# Altium PCB CFD_Chip_Test_v6_noRouting.PcbDoc
Units mil, origin at the board's own origin, x right, y up, seen from the top; angles counter-clockwise.
Board outline 3185 x 3310 mil, 2 copper layers (Top Layer, Bottom Layer); 115 components, 90 nets, 432 pads, 32 vias.
Unrouted connection lines stored in the file: 310.
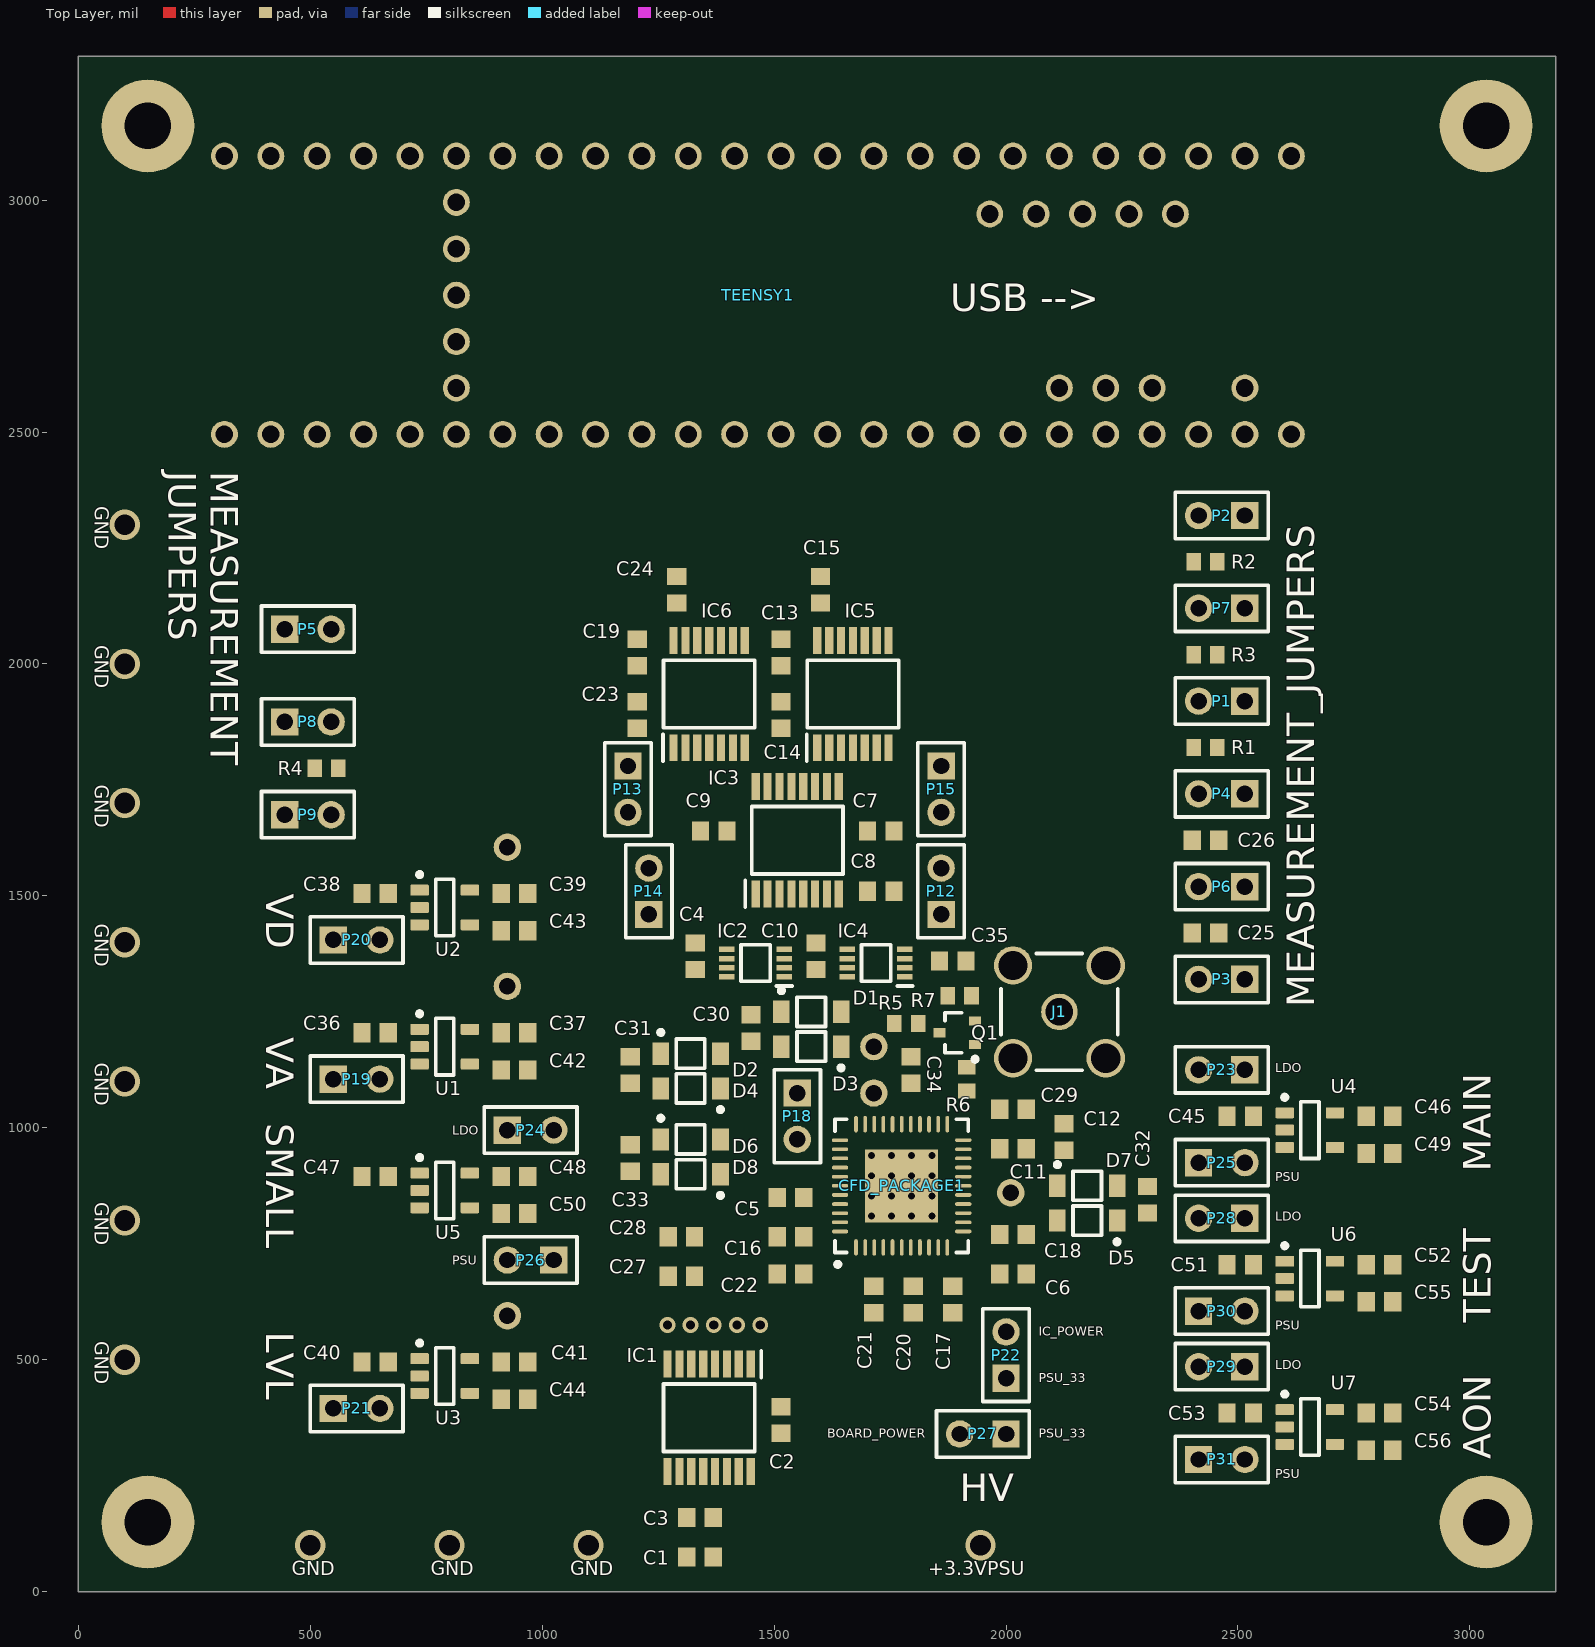
[diagram p0: Top Layer view]
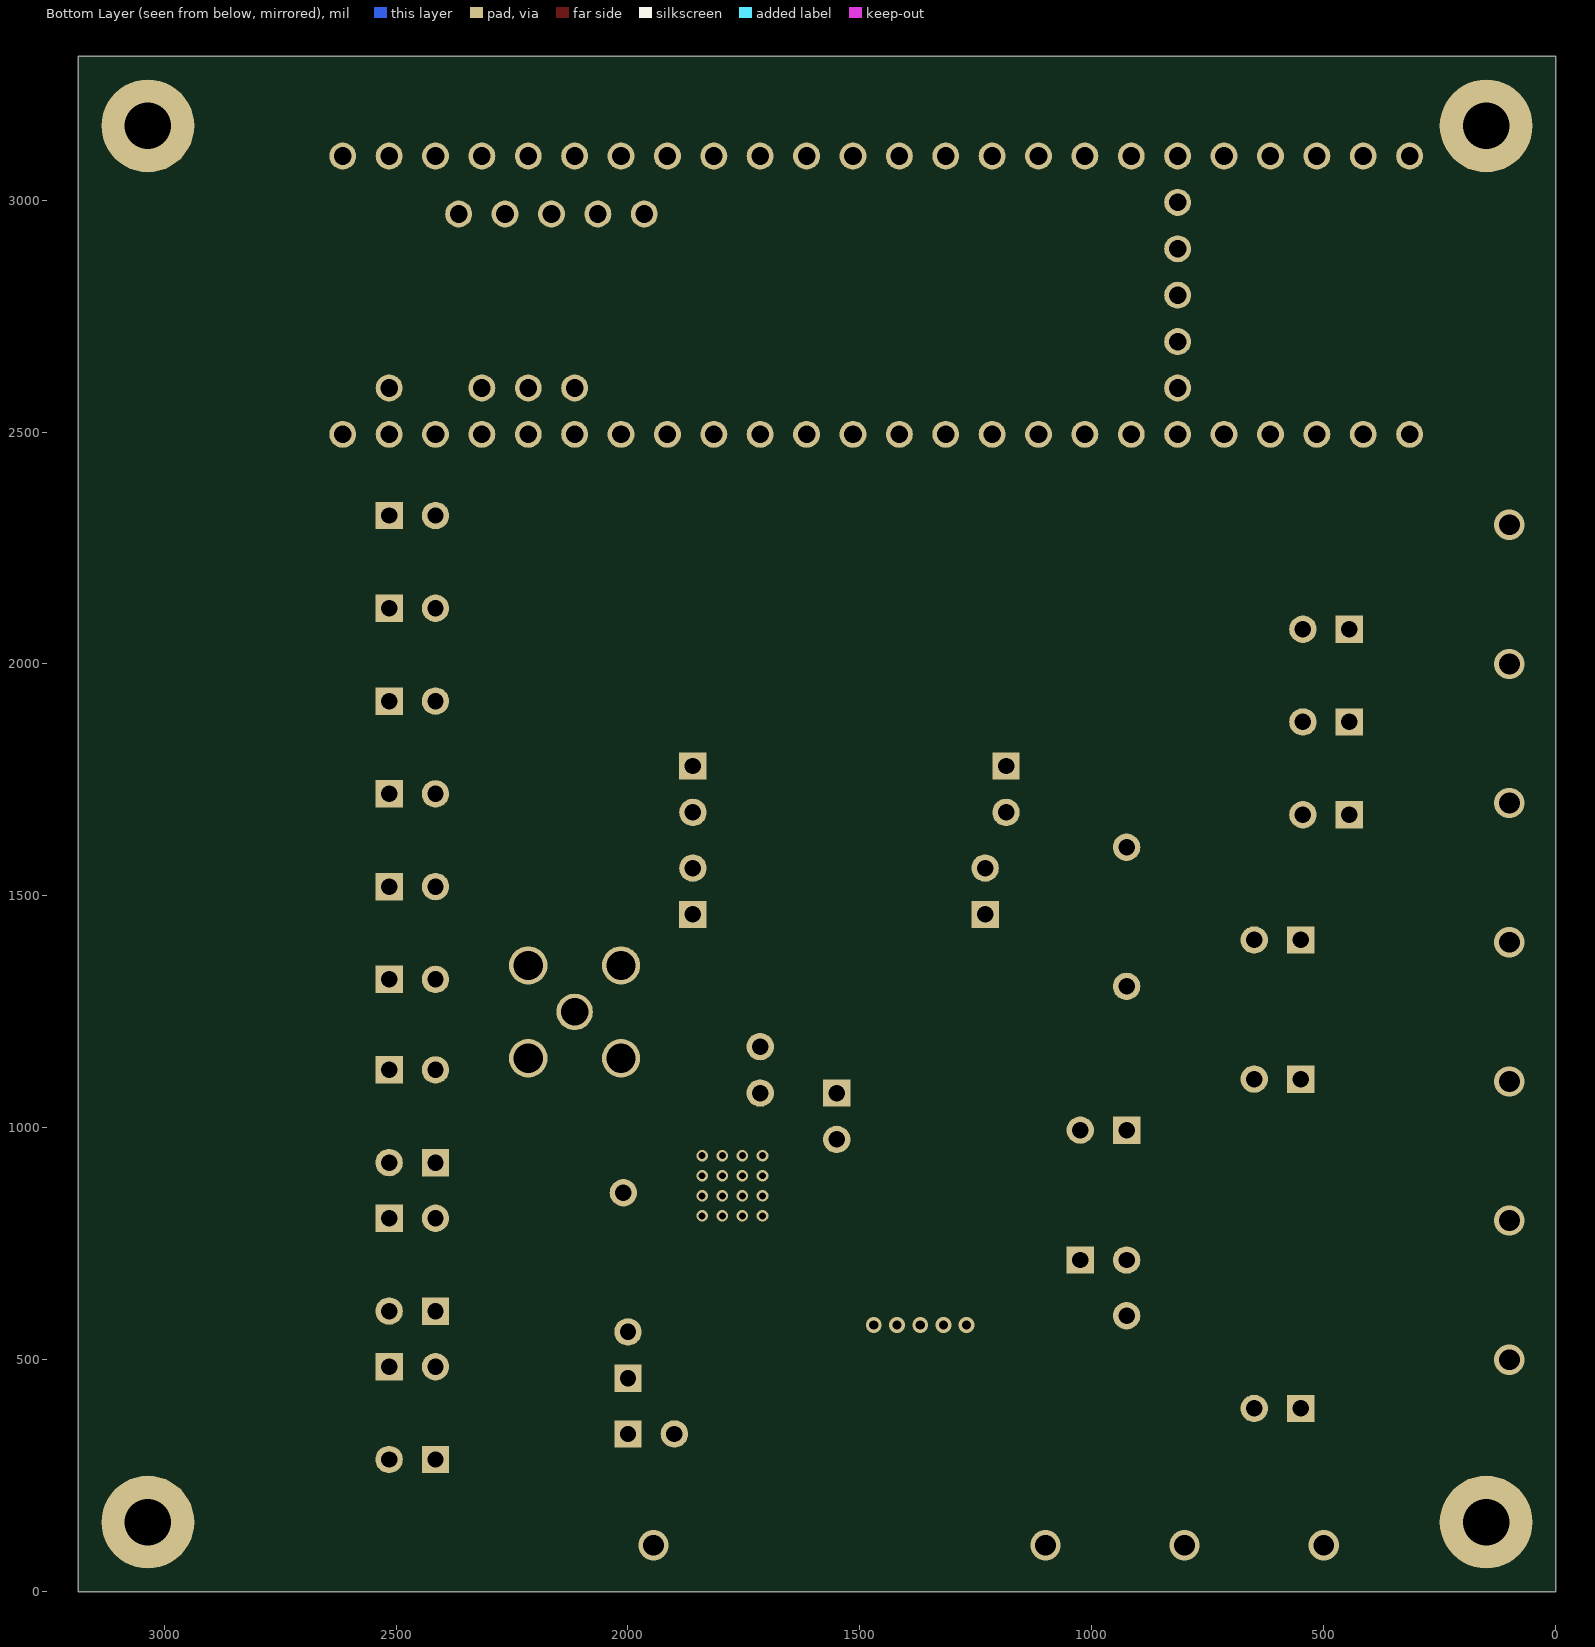
[diagram p1: Bottom Layer view, seen from below]

## Layer stack, top to bottom
Top Solder: solder mask 0.4, Solder Resist, Dk 3.5
Top Layer: signal copper 1.4
Dielectric 1: dielectric 12.6, FR-4, Dk 4.8
Bottom Layer: signal copper 1.4
Bottom Solder: solder mask 0.4, Solder Resist, Dk 3.5

## Board outline
0,0 3185,0 3185,3310 0,3310

## Design rules (kind name [scope] priority, off if disabled: settings)
AcuteAngle [All] p1: minimum=6.00000000000000E+0001 checktracksonly=FALSE
BoardOutlineClearance [All] p1: gap=15 ignorepadtopadclearanceinfootprint=FALSE
Clearance Clearance_outa_inner2 [InNamedPolygon('outa_inner2')] p1: gap=40 ignorepadtopadclearanceinfootprint=FALSE except(0: Arc-Hole Track-Hole SMDPad-Hole THPad-Hole Via-Hole Fill-Hole Poly-Hole Region-Hole Text-Hole)
Clearance Clearance_gnd_adc_vbus [InNamedPolygon('gnd_adc') vs InNet('VBUS')] p2: gap=60 ignorepadtopadclearanceinfootprint=FALSE except(0: Arc-Hole Track-Hole SMDPad-Hole THPad-Hole Via-Hole Fill-Hole Poly-Hole Region-Hole Text-Hole)
Clearance Clearance_gnd_adc [InNamedPolygon('gnd_adc')] p3: gap=20 ignorepadtopadclearanceinfootprint=FALSE except(0: Arc-Hole Track-Hole SMDPad-Hole THPad-Hole Via-Hole Fill-Hole Poly-Hole Region-Hole Text-Hole)
Clearance Clearance_dgnd [InNamedPolygon('dgnd')] p4: gap=15 ignorepadtopadclearanceinfootprint=FALSE except(0: Arc-Hole Track-Hole SMDPad-Hole THPad-Hole Via-Hole Fill-Hole Poly-Hole Region-Hole Text-Hole)
Clearance Clearance_vbus_keepout [InPolygon vs OnLayer('Keep-Out Layer')] p5: gap=20 ignorepadtopadclearanceinfootprint=FALSE except(0: Arc-Hole Track-Hole SMDPad-Hole THPad-Hole Via-Hole Fill-Hole Poly-Hole Region-Hole Text-Hole)
Clearance Clearance_vbus [InNamedPolygon('vbus')] p6: gap=60 ignorepadtopadclearanceinfootprint=FALSE except(0: Arc-Hole Track-Hole SMDPad-Hole THPad-Hole Via-Hole Fill-Hole Poly-Hole Region-Hole Text-Hole)
Clearance Clearance_gnd [InNamedPolygon('gnd')] p7: gap=10 ignorepadtopadclearanceinfootprint=FALSE except(0: Arc-Hole Track-Hole SMDPad-Hole THPad-Hole Via-Hole Fill-Hole Poly-Hole Region-Hole Text-Hole)
Clearance [All] p8: gap=5 ignorepadtopadclearanceinfootprint=FALSE except(0: Arc-Hole Track-Hole SMDPad-Hole THPad-Hole Via-Hole Fill-Hole Poly-Hole Region-Hole Text-Hole)
DiffPairsRouting [All] p1: maxlimit=25 minlimit=5 mostfreqgap=6 toplayer_minwidth=10 toplayer_maxwidth=15 toplayer_prefwidth=15 bottomlayer_minwidth=10 bottomlayer_maxwidth=15 bottomlayer_prefwidth=15 maxuncoupledlength=500
HoleSize [All] p1: absolutevalues=TRUE maxlimit=300 minlimit=10 maxpercent=80.000 minpercent=20.000
MinimumAnnularRing [All] p1: minimumring=5
MinimumSolderMaskSliver [All] p1: minsoldermaskwidth=2
PlaneConnect [All] p1: planeconnectstyle=Relief reliefexpansion=5 reliefentries=4 reliefconductorwidth=10 reliefairgap=10
PolygonConnect PolygonConnect_4 [All vs IsNamedPolygon('NONET_L-01_P-001')] p1: thpad.connectstyle=Relief thpad.reliefconductorwidth=20 thpad.reliefentries=4 thpad.polygonreliefangle="90 Angle" thpad.airgapwidth=10 smdpad.connectstyle=Direct smdpad.reliefconductorwidth=10 smdpad.reliefentries=4 smdpad.polygonreliefangle="90 Angle" smdpad.airgapwidth=10 via.connectstyle=Relief via.reliefconductorwidth=20 via.reliefentries=4 via.polygonreliefangle="90 Angle" via.airgapwidth=10
PolygonConnect PolygonConnect_3 [All] p2: thpad.connectstyle=Relief thpad.reliefconductorwidth=20 thpad.reliefentries=4 thpad.polygonreliefangle="90 Angle" thpad.airgapwidth=10 smdpad.connectstyle=Direct smdpad.reliefconductorwidth=10 smdpad.reliefentries=4 smdpad.polygonreliefangle="90 Angle" smdpad.airgapwidth=10 via.connectstyle=Relief via.reliefconductorwidth=20 via.reliefentries=4 via.polygonreliefangle="90 Angle" via.airgapwidth=10
PolygonConnect PolygonConnect_2 [All vs IsNamedPolygon('NONET_L-01_P-001')] p3: thpad.connectstyle=Relief thpad.reliefconductorwidth=10 thpad.reliefentries=4 thpad.polygonreliefangle="90 Angle" thpad.airgapwidth=10 smdpad.connectstyle=Direct smdpad.reliefconductorwidth=10 smdpad.reliefentries=4 smdpad.polygonreliefangle="90 Angle" smdpad.airgapwidth=10 via.connectstyle=Relief via.reliefconductorwidth=20 via.reliefentries=4 via.polygonreliefangle="90 Angle" via.airgapwidth=10
PolygonConnect PolygonConnect_1 [All vs IsNamedPolygon('NONET_L-01_P-001')] p4: thpad.connectstyle=Relief thpad.reliefconductorwidth=10 thpad.reliefentries=4 thpad.polygonreliefangle="90 Angle" thpad.airgapwidth=10 smdpad.connectstyle=Direct smdpad.reliefconductorwidth=10 smdpad.reliefentries=4 smdpad.polygonreliefangle="90 Angle" smdpad.airgapwidth=10 via.connectstyle=Relief via.reliefconductorwidth=20 via.reliefentries=4 via.polygonreliefangle="90 Angle" via.airgapwidth=10
PolygonConnect [All] p5: connectstyle=Relief reliefconductorwidth=6 reliefentries=4 polygonreliefangle="90 Angle" airgapwidth=6
RoutingVias [All] p1: holewidth=12 width=24 viastyle="Through Hole" minholewidth=10 minwidth=22 maxholewidth=200 maxwidth=200
SilkToSilkClearance [All] p1: silktosilkclearance=5
SilkToSolderMaskClearance [IsPad] p1: minsilkscreentomaskgap=3 clearancetoexposedcopper=FALSE
SolderMaskExpansion [All] p1: expansion=2.2 istentingtop=FALSE
Width [All] p1: maxlimit=1000 minlimit=5 preferedwidth=10 minimp=50.000000 maximp=50.000000 favimp=50.000000
24 further rules are at their usual default settings.

## Classes and differential pairs
component class Teensy_Interface: C1 C2 C3 IC1 P1 P2 P3 P4 P5 P6 P7 P8 P9 R1 R2 R3 R4 TEENSY1
component class Power: C36 C37 C38 C39 C40 C41 C42 C43 C44 C45 C46 C47 C48 C49 C50 C51 C52 C53 C54 C55 C56 P19 P20 P21 P22 P23 P24 P25 P26 P27 P28 P29 P30 P31 U1 U2 U3 U4 U5 U6 U7
component class Chip_Inputs: C30 C31 C32 C33 C34 C35 D1 D2 D3 D4 D5 D6 D7 D8 J1 P18 Q1 R5 R6 R7
component class Chip: C4 C5 C6 C7 C8 C9 C10 C11 C12 C13 C14 C15 C16 C17 C18 C19 C20 C21 C22 C23 C24 C25 C26 C27 C28 C29 CFD_PACKAGE1 IC2 IC3 IC4 IC5 IC6 P12 P13 P14 P15

## Components (designator, comment, footprint, x,y, rotation, side; value= is the part's Value field where it differs from the comment)
C1 "1uF" CAPC1608X90X35ML10T15 1340,75 r0 top
C2 "100nF" CAPC1608X90X35ML10T15 1515,370 r270 top
C3 "100nF" CAPC1608X90X35ML10T15 1340,160 r0 top
C4 "10nF" CAPC1608X90X35ML10T15 1330,1370 r270 top
C5 "10nF" CAPC1608X90X35ML10T15 1535,850 r0 top
C6 "10nF" CAPC1608X90X35ML10T15 2015,685 r0 top
C7 "10nF" CAPC1608X90X35ML10T15 1730,1640 r180 top
C8 "100nF" CAPC1608X90X35ML10T15 1730,1510 r180 top
C9 "100nF" CAPC1608X90X35ML10T15 1370,1640 r0 top
C10 "10nF" CAPC1608X90X35ML10T15 1590,1370 r270 top
C11 "10nF" CAPC1608X90X35ML10T15 2015,955 r180 top
C12 "10nF" CAPC1608X90X35ML10T15 2125,980 r270 top
C13 "1uF" CAPC1608X90X35ML10T15 1515,2025 r90 top
C14 "100nF" CAPC1608X90X35ML10T15 1515,1890 r270 top
C15 "1uF" CAPC1608X90X35ML10T15 1600,2160 r90 top
C16 "10nF" CAPC1608X90X35ML10T15 1535,765 r0 top
C17 "10nF" CAPC1608X90X35ML10T15 1885,630 r90 top
C18 "10nF" CAPC1608X90X35ML10T15 2015,770 r180 top
C19 "1uF" CAPC1608X90X35ML10T15 1205,2025 r90 top
C20 "10nF" CAPC1608X90X35ML10T15 1800,630 r90 top
C21 "10nF" CAPC1608X90X35ML10T15 1715,630 r90 top
C22 "10nF" CAPC1608X90X35ML10T15 1535,685 r0 top
C23 "100nF" CAPC1608X90X35ML10T15 1205,1890 r270 top
C24 "1uF" CAPC1608X90X35ML10T15 1290,2160 r90 top
C25 "(10nF)" CAPC1608X90X35ML10T15 2430,1420 r180 top
C26 "(10nF)" CAPC1608X90X35ML10T15 2430,1620 r180 top
C27 "(10nF)" CAPC1608X90X35ML10T15 1300,680 r0 top
C28 "(10nF)" CAPC1608X90X35ML10T15 1300,765 r0 top
C29 "(10nF)" CAPC1608X90X35ML10T15 2015,1040 r180 top
C30 "10nF" CAPC1608X90X35ML10T15 1450,1215 r90 top
C31 "10nF" CAPC1608X90X35ML10T15 1190,1125 r90 top
C32 "10nF" CAPC1608X90X35ML10T15 2305,845 r270 top
C33 "10nF" CAPC1608X90X35ML10T15 1190,935 r90 top
C34 "Value?" CAPC1608X90X35ML10T15 1795,1125 r90 top
C35 "(Value?)" CAPC1608X90X35ML10T15 1885,1360 r0 top
C36 "(Value)" CAPC1608X90X35ML10T15 640,1205 r180 top
C37 "(Value)" CAPC1608X90X35ML10T15 940,1205 r0 top
C38 "(Value)" CAPC1608X90X35ML10T15 640,1505 r180 top
C39 "(Value)" CAPC1608X90X35ML10T15 940,1505 r0 top
C40 "(Value)" CAPC1608X90X35ML10T15 640,495 r180 top
C41 "(Value)" CAPC1608X90X35ML10T15 940,495 r0 top
C42 "(Value)" CAPC1608X90X35ML10T15 940,1125 r0 top
C43 "(Value)" CAPC1608X90X35ML10T15 940,1425 r0 top
C44 "(Value)" CAPC1608X90X35ML10T15 940,415 r0 top
C45 "(Value)" CAPC1608X90X35ML10T15 2505,1025 r180 top
C46 "(Value)" CAPC1608X90X35ML10T15 2805,1025 r0 top
C47 "(Value)" CAPC1608X90X35ML10T15 640,895 r180 top
C48 "(Value)" CAPC1608X90X35ML10T15 940,895 r0 top
C49 "(Value)" CAPC1608X90X35ML10T15 2805,945 r0 top
C50 "(Value)" CAPC1608X90X35ML10T15 940,815 r0 top
C51 "(Value)" CAPC1608X90X35ML10T15 2505,705 r180 top
C52 "(Value)" CAPC1608X90X35ML10T15 2805,705 r0 top
C53 "(Value)" CAPC1608X90X35ML10T15 2505,385 r180 top
C54 "(Value)" CAPC1608X90X35ML10T15 2805,385 r0 top
C55 "(Value)" CAPC1608X90X35ML10T15 2805,625 r0 top
C56 "(Value)" CAPC1608X90X35ML10T15 2805,305 r0 top
CFD_PACKAGE1 "CFD_package" QFN50P700X700X80_HS-45N_WIDEVIAS 1775,875 r90 top
D1 "" ONSC-SOD-123-2-425-04_V 1580,1250 r0 top
D2 "" ONSC-SOD-123-2-425-04_V 1320,1160 r0 top
D3 "" ONSC-SOD-123-2-425-04_V 1580,1175 r180 top
D4 "" ONSC-SOD-123-2-425-04_V 1320,1085 r180 top
D5 "" ONSC-SOD-123-2-425-04_V 2175,800 r180 top
D6 "" ONSC-SOD-123-2-425-04_V 1320,975 r0 top
D7 "" ONSC-SOD-123-2-425-04_V 2175,875 r0 top
D8 "" ONSC-SOD-123-2-425-04_V 1320,900 r180 top
IC1 "MAX13003EEUE+" SOP65P640X110-16N 1360,375 r270 top
IC2 "NL17SZ74USG" SOP50P310X90-8N 1460,1355 r180 top
IC3 "MAX13003EEUE+" SOP65P640X110-16N 1550,1620 r90 top
IC4 "NL17SZ74USG" SOP50P310X90-8N 1720,1355 r180 top
IC5 "TDC7200PWR" SOP65P640X120-14N 1670,1935 r90 top
IC6 "TDC7200PWR" SOP65P640X120-14N 1360,1935 r90 top
J1 "5-1814832-1" TECO-5-1814832-1_V 2115,1250 r0 top
P1 "Header 2" HDR1X2 2515,1920 r180 top
P2 "Header 2" HDR1X2 2515,2320 r180 top
P3 "Header 2" HDR1X2 2515,1320 r180 top
P4 "Header 2" HDR1X2 2515,1720 r180 top
P5 "Header 2" HDR1X2 445,2075 r0 top
P6 "Header 2" HDR1X2 2515,1520 r180 top
P7 "Header 2" HDR1X2 2515,2120 r180 top
P8 "Header 2" HDR1X2 445,1875 r0 top
P9 "Header 2" HDR1X2 445,1675 r0 top
P12 "Header 2" HDR1X2 1860,1460 r90 top
P13 "Header 2" HDR1X2 1185,1780 r270 top
P14 "Header 2" HDR1X2 1230,1460 r90 top
P15 "Header 2" HDR1X2 1860,1780 r270 top
P18 "Header 2" HDR1X2 1550,1075 r270 top
P19 "Header 2" HDR1X2 550,1105 r0 top
P20 "Header 2" HDR1X2 550,1405 r0 top
P21 "Header 2" HDR1X2 550,395 r0 top
P22 "Header 2" HDR1X2 2000,460 r90 top
P23 "Header 2" HDR1X2 2515,1125 r180 top
P24 "Header 2" HDR1X2 925,995 r0 top
P25 "Header 2" HDR1X2 2415,925 r0 top
P26 "Header 2" HDR1X2 1025,715 r180 top
P27 "Header 2" HDR1X2 2000,340 r180 top
P28 "Header 2" HDR1X2 2515,805 r180 top
P29 "Header 2" HDR1X2 2515,485 r180 top
P30 "Header 2" HDR1X2 2415,605 r0 top
P31 "Header 2" HDR1X2 2415,285 r0 top
Q1 "BFR182W" INF-SOT323_L 1895,1205 r180 top
R1 "0Ohm" RESC1609X50X30NL8T20 2430,1820 r180 top
R2 "0Ohm" RESC1609X50X30NL8T20 2430,2220 r180 top
R3 "0Ohm" RESC1609X50X30NL8T20 2430,2020 r180 top
R4 "0Ohm" RESC1609X50X30NL8T20 535,1775 r0 top
R5 "(Value?)" RESC1609X50X30NL8T20 1785,1225 r180 top
R6 "(50Ohm)" RESC1609X50X30NL8T20 1915,1105 r90 top
R7 "0Ohm (Value?)" RESC1609X50X30NL8T20 1900,1285 r0 top
TEENSY1 "TEENSY_3.5/3.6" TEENSY_3.5/3.6 1515,2795 r180 top
U1 "TPS73218DBVT" DBV0005A_N 790,1175 r0 top
U2 "TPS73218DBVT" DBV0005A_N 790,1475 r0 top
U3 "TPS73218DBVT" DBV0005A_N 790,465 r0 top
U4 "TPS73218DBVT" DBV0005A_N 2655,995 r0 top
U5 "TPS73218DBVT" DBV0005A_N 790,865 r0 top
U6 "TPS73218DBVT" DBV0005A_N 2655,675 r0 top
U7 "TPS73218DBVT" DBV0005A_N 2655,355 r0 top

## Footprints (in the part's own frame and the unit in brackets; to place one, negate y for a bottom-side part, rotate by r counter-clockwise, add the part's x,y. Pads: shape width x height; smd on the part's side, far side on the other; paste and mask are expansions set on the pad)
CAPC1608X90X35ML10T15 [mm] "Chip Capacitor, 2-Leads, Body 1.7x0.9mm, IPC Low Density"
  rect 0.95x1.05 smd: 1(-0.725,0) 2(0.725,0)
  body extent -0.85,-0.45 0.85,0.45, height 0.9
DBV0005A_N [mm] "SOT23, 5-Leads, Body 3.05x1.75mm, Pitch 0.95mm, IPC Medium Density"
  rrect17% 1x0.6 smd: 1(-1.375,0.95) 2(-1.375,0) 3(-1.375,-0.95) 4(1.375,-0.95) 5(1.375,0.95)
  silkscreen extent -1.5,-1.55 0.5,1.92, body extent -1.42,-1.46 1.42,1.46, height 1.08
HDR1X2 [mm] "Connector; Header; 2 Position"
  rect 1.5x1.5 hole 0.9: 1(0,0)
  round 1.5 hole 0.9: 2(2.54,0)
  silkscreen extent -1.27,-1.27 3.81,1.27
INF-SOT323_L [mm] "SOT23, 3-Leads, Body 2x1.25 mm, Pitch 0.65 mm, IPC High Density"
  rect 0.65x0.5 smd: 1(-0.975,0.65) 2(-0.975,-0.65) 3(0.975,0)
  silkscreen extent -1.1,-1.1 0.67,1.57, body extent -0.67,-1.1 0.67,1.1, height 1
ONSC-SOD-123-2-425-04_V [mm] "SOD, 2-Leads, Body 2.69x1.6mm"
  rect 0.91x1.22 smd: 1(-1.635,0) 2(1.635,0)
  silkscreen extent -1.76,-0.8 0.78,1.28, body extent -1.35,-0.8 1.35,0.8, height 1.35
QFN50P700X700X80_HS-45N_WIDEVIAS [mm] "QFN, 44-Leads, Body 7.00x7.00mm, Pitch 0.50mm, Thermal Pad 4.00x4.00mm, IPC Medium Density"
  oval 0.9x0.2 smd: 1(-3.375,2.5) 2(-3.375,2) 3(-3.375,1.5) 4(-3.375,1) 5(-3.375,0.5) 6(-3.375,0) 7(-3.375,-0.5) 8(-3.375,-1) 9(-3.375,-1.5) 10(-3.375,-2) 11(-3.375,-2.5) 23(3.375,-2.5) 24(3.375,-2) 25(3.375,-1.5) 26(3.375,-1) 27(3.375,-0.5) 28(3.375,0) 29(3.375,0.5) 30(3.375,1) 31(3.375,1.5) 32(3.375,2) 33(3.375,2.5)
  oval 0.2x0.9 smd: 12(-2.5,-3.375) 13(-2,-3.375) 14(-1.5,-3.375) 15(-1,-3.375) 16(-0.5,-3.375) 17(0,-3.375) 18(0.5,-3.375) 19(1,-3.375) 20(1.5,-3.375) 21(2,-3.375) 22(2.5,-3.375) 34(2.5,3.375) 35(2,3.375) 36(1.5,3.375) 37(1,3.375) 38(0.5,3.375) 39(0,3.375) 40(-0.5,3.375) 41(-1,3.375) 42(-1.5,3.375) 43(-2,3.375) 44(-2.5,3.375)
  rect 4x4 smd: 35(0,0)
  silkscreen extent -4.42,-3.65 3.65,3.65, body extent -3.5,-3.5 3.5,3.5, height 0.8
RESC1609X50X30NL8T20 [mm] "Chip Resistor, 2-Leads, Body 1.65x0.95mm, IPC Medium Density"
  rect 0.8x0.95 smd: 1(-0.65,0) 2(0.65,0)
  body extent -0.82,-0.48 0.82,0.48, height 0.5
SOP50P310X90-8N [mm]
  rect 0.85x0.3 smd: 1(-1.575,0.75) 2(-1.575,0.25) 3(-1.575,-0.25) 4(-1.575,-0.75) 5(1.575,-0.75) 6(1.575,-0.25) 7(1.575,0.25) 8(1.575,0.75)
  silkscreen extent -2,-1 0.8,1.25, body extent -1.55,-1 1.55,1, height 0.9
SOP65P640X110-16N [mm]
  rect 1.475x0.45 smd: 1(-2.938,2.275) 2(-2.938,1.625) 3(-2.938,0.975) 4(-2.938,0.325) 5(-2.938,-0.325) 6(-2.938,-0.975) 7(-2.938,-1.625) 8(-2.938,-2.275) 9(2.938,-2.275) 10(2.938,-1.625) 11(2.938,-0.975) 12(2.938,-0.325) 13(2.938,0.325) 14(2.938,0.975) 15(2.938,1.625) 16(2.938,2.275)
  silkscreen extent -3.67,-2.5 1.85,2.85, body extent -3.2,-2.5 3.2,2.5, height 1.1
SOP65P640X120-14N [mm]
  rect 1.475x0.45 smd: 1(-2.938,1.95) 2(-2.938,1.3) 3(-2.938,0.65) 4(-2.938,0) 5(-2.938,-0.65) 6(-2.938,-1.3) 7(-2.938,-1.95) 8(2.938,-1.95) 9(2.938,-1.3) 10(2.938,-0.65) 11(2.938,0) 12(2.938,0.65) 13(2.938,1.3) 14(2.938,1.95)
  silkscreen extent -3.67,-2.5 1.85,2.52, body extent -3.2,-2.5 3.2,2.5, height 1.13
TECO-5-1814832-1_V [mm] "THD, 5-Leads, Body 6.4x6.4mm, Pitch 5.08mm"
  round 2 hole 1.5: 1(0,0)
  round 2.1 hole 1.6: 2(-2.54,2.54) 3(-2.54,-2.54) 4(2.54,-2.54) 5(2.54,2.54)
  silkscreen extent -3.2,-3.2 3.2,3.2, body extent -3.21,-3.21 3.19,3.19, height 9.5
TEENSY_3.5/3.6 [mil]
  round 58 / inner round 60 / far side round 58 hole 38: 0/RX(-1000,-300) 1/TX(-900,-300) 2(-800,-300) 3/CANTX(-700,-300) 3V3(300,-300) 3V3_2(700,-100) 3V3_LO(-900,300) 4/CANRX(-600,-300) 5(-500,-300) 6(-400,-300) 7(-300,-300) 8(-200,-300) 9/CS(-100,-300) 10/CS(0,-300) 11/MOSI(100,-300) 12/MISO(200,-300) 13/SCK(200,300) 14/A0(100,300) 15/A1(0,300) 16/A2(-100,300) 17/A3(-200,300) 18/A4/SDA(-300,300) 19/A5/SCL(-400,300) 20/A6(-500,300) 21/A7(-600,300) 21/DAC0(500,300) 22/A8(-700,300) 23/A9(-800,300) 24(400,-300) 25(500,-300) 26(600,-300) 27(700,-300) 28(800,-300) 29(900,-300) 30(1000,-300) 31/A12(1100,-300) 32/A13(1200,-300) 33/A14(1200,300) 34/A15(1100,300) 35/A16(1000,300) 36/A17(900,300) 37/A18(800,300) 38/A19(700,300) 39/A20(600,300) A10(-700,200) A11(-600,200) A22/DAC1(400,300) AGND(-1000,300) AREF(-800,200) GND(-1100,-300) GND2(300,300) GND3(700,0) PROG(700,100) RESET(700,200) U5V(-850,-175) UD+(-650,-175) UD-(-750,-175) UGND1(-550,-175) UGND2(-450,-175) VBAT(700,-200) VIN(-1100,300) VUSB(-1000,200)

## Part data
C1 C2 C3 C4 C5 C6 C7 C8 C9 C10 C11 C12 C13 C14 C15 C16 C17 C18 C19 C20 C21 C22 C23 C24 C25 C26 C27 C28 C29 C30 C31 C32 C33 C34 C35 C36 C37 C38 C39 C40 C41 C42 C43 C44 C45 C46 C47 C48 C49 C50 C51 C52 C53 C54 C55 C56: library part CMP-2000-04945-1, "0603", Capacitance=22pF, Dielectric=C0G, Manufacturer=Murata, Package Description="2-Pin Surface Mount Device, Body 1.6 x 0.8 mm", Package Reference=603, Rated Voltage=50V, Tolerance (%)=±5%, Case Size/Dimension=0603, Datasheet URL=https://datasheet.ciiva.com/11786/0900766b807a1cab-11786398.pdf, Datasheet Version=Jul-06, Manufacturer URL=http://www.murata.com/
D1 D2 D3 D4 D5 D6 D7 D8: library part CMP-1060-00509-1, "Zener Voltage Regulator, 2-Pin SOD-123, Pb-Free, Tape and Reel", Manufacturer="On Semiconductor", PartNumber=MMSZ4679T1G, ComponentLink1Description="Manufacturer URL", ComponentLink1URL=http://www.onsemi.com/, ComponentLink2Description=Datasheet, ComponentLink2URL=http://www.onsemi.com/pub_link/Collateral/MMSZ4678T1-D.PDF, ComponentLink3Description="Package Specification", ComponentLink3URL=http://www.onsemi.com/pub_link/Collateral/425-04.PDF, DatasheetVersion="Rev. 9", Mounting Technology="Surface Mount", P Max (W)=0.5, PackageDescription="2-Pin SOD, Body 1.6 x 2.69 mm", PackageReference=SOD-123-2-425-04, PackageVersion="Rev. G, 10/2009", Packing="Tape and Reel", RoHS=Pb-Free, VZ Typ (V)=2
IC1 IC3: "Integrated Circuit", Manufacturer_Name="Maxim Integrated", Datasheet Link=https://pdfserv.maximintegrated.com/en/ds/MAX13000E-MAX13005E.pdf, Height=1.1mm, Manufacturer_Part_Number=MAX13003EEUE+
IC2 IC4: "Flip Flops 1.65-5.5V CMOS Single D-Type", Manufacturer_Name="ON Semiconductor", Datasheet Link=http://www.onsemi.com/pub/Collateral/NL17SZ74-D.PDF, Height=0.9mm, Manufacturer_Part_Number=NL17SZ74USG
IC5 IC6: "Integrated Circuit", Manufacturer_Name="Texas Instruments", Datasheet Link=http://www.ti.com/lit/gpn/tdc7200, Height=1.2mm, Manufacturer_Part_Number=TDC7200PWR
J1: library part CMP-2000-05415-1, "SMA Connector, Pitch 5.08 mm, 1 Position, Height 9.5 mm, Tail Length 4 mm, -65 to 165 degC, RoHS, Bulk", Frequency Max=3GHz, Manufacturer="TE Connectivity", Package Description="SMA Connector, Pitch 5.08 mm, 1 Position, Height 9.5 mm, Tail Length 4 mm", Coaxial Cable Types=-, Coaxial Termination=Solder, Connector Body Style=StraightJack, Connector Mounting=PCBMount, Connector Type=SMACoaxial, Contact Material=BerylliumCopper, Contact Plating=GoldPlatedContacts, Datasheet URL=http://www.onlinecomponents.com/productFiles/mf-AMP/eng_cd_1814832_a.pdf, Datasheet Version="Rev. B1, 03/2011", Impedance=50ohm, Manufacturer URL=http://www.te.com/, Package Reference=5-1814832-1, Product Range=ZDCSeries, SVHC=NoSVHC(15-Jun-2015)
P1 P2 P3 P4 P5 P6 P7 P8 P9 P12 P13 P14 P15 P18 P19 P20 P21 P22 P23 P24 P25 P26 P27 P28 P29 P30 P31: "Header, 2-Pin", LatestRevisionDate=17-Jul-2002, LatestRevisionNote="Re-released for DXP Platform.", Publisher="Altium Limited"
Q1: library part CMP-1191-00013-1, "NPN Silicon RF Transistor, 12 V VCEO, 35 mA IC, 19 dB Gmax, SOT323, Green", Manufacturer=Infineon, ComponentLink1Description="Manufacturer URL", ComponentLink1URL=http://www.infineon.com/, ComponentLink2Description=Datasheet, ComponentLink2URL=http://www.infineon.com/dgdl/bfr182w.pdf?folderId=db3a30431400ef68011425b1354605c1&fileId=db3a30431400ef680114269d1e43064c&location=en.Products.RF.RF_Transistors_.Low_Noise_Si_Transistors_up_to_2_5_GHz.DATASHEET.bfr182w.pdf, ComponentLink3Description="Package Specification", ComponentLink3URL=http://www.infineon.com/dgdl/SOT323-Package_Overview.pdf?folderId=db3a30431936bc4b0119533e1dcb3c92&fileId=db3a30431936bc4b011953495f283cb1, DatasheetVersion=Apr-2010, Gmax (typ)="19 dB", Green=yes, Group="For low frequencies e.g. VHF/UHF", Halogen-free=yes, IC (max)="35 mA", Mounting Technology="Surface Mount", NFmin (typ)="0.9 dB", PackageDescription="3-Pin Small Outline Transistor Package, 1.25 x 2 mm Body, 0.65 mm Pitch", PackageReference=SOT323, PartNumber=BFR182W, Ptot (max)=250mW, VCEO (max)="12 V"
R1 R2 R3 R4 R5 R6 R7: library part CMP-2000-03816-5, "Chip Resistor, 0 Ohm, Jumper, 100 mW, -55 to 155 degC, 0603 (1608 Metric), RoHS, Tape and Reel", Manufacturer="Vishay Semiconductor", Max Operating Temperature="155 degC", Min Operating Temperature="-55 degC", Package Quantity=5000, Voltage Rating="75 V", ComponentLink1Description="Manufacturer URL", ComponentLink1URL=http://www.vishay.com/, ComponentLink2Description=Datasheet, ComponentLink2URL=http://www.vishay.com/docs/20035/dcrcwe3.pdf, DatasheetVersion=06/2012, Height="0.45 mm", Length="1.55 mm", Mount="Surface Mount", Mounting Technology="Surface Mount", PackageDescription="2-Pin Surface Mount Device, Body 1.575 x 0.85 mm", PackageReference=0603, Packaging="Tape and Reel", Pins=2, REACH SVHC=Unknown, RoHSCompliant=true
U1 U2 U3 U4 U5 U6 U7: library part CMP-0394-00378-2, "Single Output Fast Transient Response LDO, 200 mA, Fixed 1.8 V Output, 1.7 to 5.5 V Input, with Reverse Current Protection, 5-pin SOT-23 (DBV), -40 to 85 degC, Green (RoHS & no Sb/Br)", Manufacturer="Texas Instruments", Accuracy(%)=1, Code_JEDEC=MO-178, ComponentLink1Description="Manufacturer URL", ComponentLink1URL=http://www.ti.com/, ComponentLink2Description=Datasheet, ComponentLink2URL=http://www.ti.com/general/docs/lit/getliterature.tsp?genericPartNumber=TPS73218&fileType=pdf, ComponentLink3Description="Package Specification", ComponentLink3URL=http://www.ti.com/litv/pdf/mpds018i, DatasheetVersion=SBVS037O, Eco-Plan="Green (RoHS & no Sb/Br)", Fixed Output Options(V)=1.8, Iout(Max)(A)=0.25, Iq(Typ)(mA)=0.4, Mounting Technology="Surface Mount", PackageDescription="5-Pin Plastic Small Outline, Body 1.60 Ãƒâ€” 2.90 mm, Pitch 0.95 mm", PackageReference=DBV0005A, PackageVersion=4073253-4/K, PartNumber=TPS73218DBVT, SubFamily="Single Channel LDO", Vdo(Typ)(mV)=40, Vin(Max)(V)=5.5, Vin(Min)(V)=1.7, Vout Adj(Max)(V)=1.8, Vout Adj(Min)(V)=1.8
TEENSY1: DeviceSetName=TEENSY_3.5/3.6, GateName_1=G$1, LibraryName=Teensy356, Package=TEENSY_3.5/3.6, SymbolName_1=TEENSY_3.5/3.6

## Free pads (board coordinates)
  round 200 hole 100: 3(150,150) 3(150,3160) 3(3035,150) 3(3035,3160)
  round 59.06 hole 35.43: 4(925,595) 4(925,1305) 4(925,1605) 4(1715,1075) 4(1715,1175) 4(2010,860)

## Via types
v1: diameter 25, hole 15, Top Layer to Bottom Layer, 16 vias
v2: diameter 65, hole 45, Top Layer to Bottom Layer, 11 vias
v3: diameter 34, hole 20, Top Layer to Bottom Layer, 5 vias

## Nets (pads, with @x,y where several pads share a name; then routed paths per layer and width w, separated by ;. In a path a pad name is that pad's centre, name@x,y a point inside that pad or via, vN(x,y) a via of type N, cw(c..) or ccw(c..) an arc to the next point about the centre after c; other vN are vias at no path point)
+1.8VA: C30.2 C31.2 C32.2 C33.2 C37.1 D1.1 D2.1 D5.1 D6.1 pad.4@925,1305 U1.5
+1.8VD: C4.2 C8.2 C10.2 C39.1 IC2.2 IC2.7 IC2.8 IC3.4 IC3.5 IC4.2 IC4.7 IC4.8 pad.4@925,1605 U2.5
+1.8VD_SHIFT: C2.1 C41.1 IC1.4 IC1.5 pad.4@925,595 U3.5
+1.8VDDAON: C54.1 P29.1 U7.5
+1.8VDDMAIN: C46.1 P23.1 U4.5
+1.8VDDSMALL: C48.1 P24.1 U5.5
+1.8VDDTEST: C52.1 P28.1 U6.5
+1.8VPSU: P25.2 P26.2 P30.2 P31.2
+3.3VA: C36.1 P19.2 U1.1 U1.3
+3.3VCHIP: C45.1 C47.1 C51.1 C53.1 P27.2 U4.1 U4.3 U5.1 U5.3 U6.1 U6.3 U7.1 U7.3
+3.3VD: C7.2 C9.2 C13.1 C14.1 C19.1 C23.1 C38.1 IC3.13 IC5.14 IC6.14 P20.2 U2.1 U2.3
+3.3VD_SHIFT: C1.2 C3.2 C40.1 IC1.13 P21.2 U3.1 U3.3
+3.3VPSU: P19.1 P20.1 P21.1 P22.1 P27.1
  other v2: 1945,100
/RST_TIME: IC2.6 IC4.6 TEENSY1.17/A3
/SCAN_IN: CFD_PACKAGE1.1 IC1.2
  other v3: 1420,575
/SCAN_IN_33: IC1.15 TEENSY1.34/A15
/SCAN_LOAD: CFD_PACKAGE1.44 IC1.3
  other v3: 1370,575
/SCAN_LOAD_33: IC1.14 TEENSY1.35/A16
/SCAN_OUT: CFD_PACKAGE1.41 IC1.8
  other v3: 1270,575
/SCAN_OUT_33: IC1.9 TEENSY1.37/A18
/SPI_CS_MAIN: IC5.11 TEENSY1.10/CS
/SPI_CS_SMALL: IC6.11 TEENSY1.31/A12
/TIME_MAIN_18: IC3.8 IC4.3 P12.2
/TIME_MAIN_33: IC3.9 P15.2
/TIME_SMALL_18: IC2.3 IC3.3 P14.2
/TIME_SMALL_33: IC3.14 P13.2
GND: C1.1 C2.2 C3.1 C4.1 C5.1 C6.2 C7.1 C8.1 C9.1 C10.1 C11.1 C12.1 C13.2 C14.2 C15.2 C16.1 C17.1 C18.1 C19.2 C20.1 C21.1 C22.1 C23.2 C24.2 C25.1 C26.1 C27.1 C28.1 C29.1 C30.1 C31.1 C32.1 C33.1 C35.1 C36.2 C37.2 C38.2 C39.2 C40.2 C41.2 C42.2 C43.2 C44.2 C45.2 C46.2 C47.2 C48.2 C49.2 C50.2 C51.2 C52.2 C53.2 C54.2 C55.2 C56.2 CFD_PACKAGE1.2 CFD_PACKAGE1.7 CFD_PACKAGE1.12 CFD_PACKAGE1.21 CFD_PACKAGE1.24 CFD_PACKAGE1.35 CFD_PACKAGE1.38 CFD_PACKAGE1.40 D3.2 D4.2 D7.2 D8.2 IC1.11 IC1.12 IC2.4 IC3.10 IC3.12 IC3.15 IC4.4 IC5.7 IC6.7 J1.2 J1.3 J1.4 J1.5 pad.3 R6.1 R7.1 TEENSY1.AGND TEENSY1.GND TEENSY1.GND2 U1.2 U2.2 U3.2 U4.2 U5.2 U6.2 U7.2
  other v1: 1710.04,810.04 1753.35,810.04 1796.65,810.04 1839.96,810.04 1710.04,853.35 1753.35,853.35 1796.65,853.35 1839.96,853.35 1710.04,896.65 1753.35,896.65 1796.65,896.65 1839.96,896.65 1710.04,939.96 1753.35,939.96 1796.65,939.96 1839.96,939.96
  other v2: 500,100 800,100 1100,100 100,500
IIN: C34.2 Q1.3 R5.1
IIN_COUPLE: C34.1 CFD_PACKAGE1.28
NetC15_1: C15.1 IC5.13
NetC24_1: C24.1 IC6.13
NetC42_1: C42.1 U1.4
NetC43_1: C43.1 U2.4
NetC44_1: C44.1 U3.4
NetC49_1: C49.1 U4.4
NetC50_1: C50.1 U5.4
NetC55_1: C55.1 U6.4
NetC56_1: C56.1 U7.4
OUT_MAIN: CFD_PACKAGE1.26 IC4.1
OUT_SMALL: CFD_PACKAGE1.30 IC2.1
RST_TEST: CFD_PACKAGE1.16 IC1.1
  other v3: 1470,575
RST_TEST_33: IC1.16 TEENSY1.33/A14
SCAN_CLK: CFD_PACKAGE1.43 IC1.7
  other v3: 1320,575
SCAN_CLK_33: IC1.10 TEENSY1.36/A17
SPI_CLK_MAIN: IC5.12 TEENSY1.24
SPI_CLK_SMALL: IC6.12 TEENSY1.32/A13
SPI_DIN_MAIN: IC5.10 TEENSY1.3V3
SPI_DIN_SMALL: IC6.10 TEENSY1.30
SPI_DOUT_MAIN: IC5.9 TEENSY1.12/MISO
SPI_DOUT_SMALL: IC6.9 TEENSY1.29
SPI_INTRPT_MAIN: IC5.8 TEENSY1.11/MOSI
SPI_INTRPT_SMALL: IC6.8 TEENSY1.28
TDC_CLK: IC5.5 IC6.5 TEENSY1.9/CS
TDC_EN_MAIN: IC5.1
TDC_EN_SMALL: IC6.1
TDC_START_MAIN: IC5.3 TEENSY1.7
TDC_START_SMALL: IC6.3 TEENSY1.26
TDC_TRIGG_MAIN: IC5.2 TEENSY1.6
TDC_TRIGG_SMALL: IC6.2 TEENSY1.27
TIME_MAIN_18: IC3.6 IC4.5 P12.1
TIME_MAIN_33: IC3.11 IC5.4 P15.1
TIME_SMALL_18: IC2.5 IC3.1 P14.1
TIME_SMALL_33: IC3.16 IC6.4 P13.1
VBG_TEST: C25.2 CFD_PACKAGE1.15 P6.2
VBG_TEST_I: P6.1 TEENSY1.20/A6
VDAC_MAIN: C26.2 CFD_PACKAGE1.22 P4.2
VDAC_MAIN_IO: P4.1 TEENSY1.18/A4/SDA
VDAC_SMALL: C27.2 CFD_PACKAGE1.34 P8.2
VDAC_SMALL_IO: P8.1 TEENSY1.39/A20
VDDAON: C20.2 C21.2 C22.2 CFD_PACKAGE1.3 CFD_PACKAGE1.9 CFD_PACKAGE1.42 P1.2 P29.2 P31.1 R1.2
VDDAON_I: P1.1 R1.1 TEENSY1.19/A5/SCL
VDDHV: C16.2 C17.2 C18.2 CFD_PACKAGE1.5 CFD_PACKAGE1.14 CFD_PACKAGE1.39 P22.2
VDDMAIN: C11.2 C12.2 CFD_PACKAGE1.20 CFD_PACKAGE1.25 P7.2 P23.2 P25.1 R3.2
VDDMAIN_I: P7.1 R3.1 TEENSY1.16/A2
VDDRF: pad.4@1715,1175 R5.2
VDDSMALL: C5.2 CFD_PACKAGE1.36 P9.2 P24.2 P26.1 R4.2
VDDSMALL_IO: P9.1 R4.1 TEENSY1.38/A19
VDDTEST: C6.1 CFD_PACKAGE1.13 P28.2 P30.1
VE_DEGEN: C35.2 Q1.2 R7.2
VIN: J1.1 Q1.1 R6.2
VIN_TEST: CFD_PACKAGE1.17 D5.2 D7.1 pad.4@2010,860
VINN_ZCD_SMALL: CFD_PACKAGE1.32 D2.2 D4.1 P18.1
VINP_LED_SMALL: CFD_PACKAGE1.31 D1.2 D3.1 pad.4@1715,1075
VINP_ZCD_SMALL: CFD_PACKAGE1.33 D6.2 D8.1 P18.2
VOUT_TEST: CFD_PACKAGE1.18 P3.2
VOUT_TEST_I: P3.1 TEENSY1.21/A7
VREF_ATTEN: C29.2 CFD_PACKAGE1.27 P2.2 R2.2
VREF_ATTEN_O: P2.1 R2.1 TEENSY1.A22/DAC1
VREF_PREAMP: C28.2 CFD_PACKAGE1.29 P5.2
VREF_PREAMP_IO: P5.1 TEENSY1.21/DAC0
pads on no net: CFD_PACKAGE1.4 CFD_PACKAGE1.6 CFD_PACKAGE1.8 CFD_PACKAGE1.10 CFD_PACKAGE1.11 CFD_PACKAGE1.19 CFD_PACKAGE1.23 CFD_PACKAGE1.37 IC1.6 IC3.2 IC3.7 IC5.6 IC6.6 TEENSY1.0/RX TEENSY1.1/TX TEENSY1.2 TEENSY1.3/CANTX TEENSY1.3V3_2 TEENSY1.3V3_LO TEENSY1.4/CANRX TEENSY1.5 TEENSY1.8 TEENSY1.13/SCK TEENSY1.14/A0 TEENSY1.15/A1 TEENSY1.22/A8 TEENSY1.23/A9 TEENSY1.25 TEENSY1.A10 TEENSY1.A11 TEENSY1.AREF TEENSY1.GND3 TEENSY1.PROG TEENSY1.RESET TEENSY1.U5V TEENSY1.UD+ TEENSY1.UD- TEENSY1.UGND1 TEENSY1.UGND2 TEENSY1.VBAT TEENSY1.VIN TEENSY1.VUSB
copper on no net:
  other v2: 100,800 100,1100 100,1400 100,1700 100,2000 100,2300

## Silkscreen, mask and mechanical layers (free items; w line width, h text height)
Top Overlay:
  text "USB -->" at 1880.06,2760.01 h60
  text "MEASUREMENT / JUMPERS" at 195,2415 h60 r270
  text "GND" at 35,2339.99 h30 r270
  text "GND" at 35,2039.99 h30 r270
  text "GND" at 35,1739.99 h30 r270
  text "VD" at 405.01,1504.98 h60 r270
  text "GND" at 35,1439.99 h30 r270
  text "MEASUREMENT_JUMPERS" at 2664.99,1260.18 h60 r90
  text "VA" at 405.01,1194.98 h60 r270
  text "GND" at 35,1139.99 h30 r270
  text "LDO" at 2580,1120 h20
  text "SMALL" at 405.01,1009.95 h60 r270
  text "LDO" at 806.68,985 h20
  text "MAIN" at 3045,904.89 h60 r90
  text "PSU" at 2580,885 h20
  text "GND" at 35,839.99 h30 r270
  text "LDO" at 2580,800 h20
  text "PSU" at 806.68,705 h20
  text "TEST" at 3045,580.04 h60 r90
  text "PSU" at 2580,565 h20
  text "LVL" at 405.01,559.97 h60 r270
  text "IC_POWER" at 2070,551.67 h20
  text "GND" at 35,539.99 h30 r270
  text "LDO" at 2580,480 h20
  text "PSU_33" at 2070,451.67 h20
  text "BOARD_POWER" at 1615,331.67 h20
  text "PSU_33" at 2070,331.67 h20
  text "AON" at 3045,285.03 h60 r90
  text "PSU" at 2580,245 h20
  text "HV" at 1900.02,195.01 h60
  text "GND" at 460.01,35 h30
  text "GND" at 760.01,35 h30
  text "GND" at 1060.01,35 h30
  text "+3.3VPSU" at 1832.54,35 h30